# Altium PCB PCB_DA1.PcbDoc
Units mm, origin at the board's own origin, x right, y up, seen from the top; angles counter-clockwise.
Board outline 80 x 45 mm, 2 copper layers (Top Layer, Bottom Layer); 16 components, 12 nets, 60 pads, 0 vias.
Unrouted connection lines stored in the file: 3.
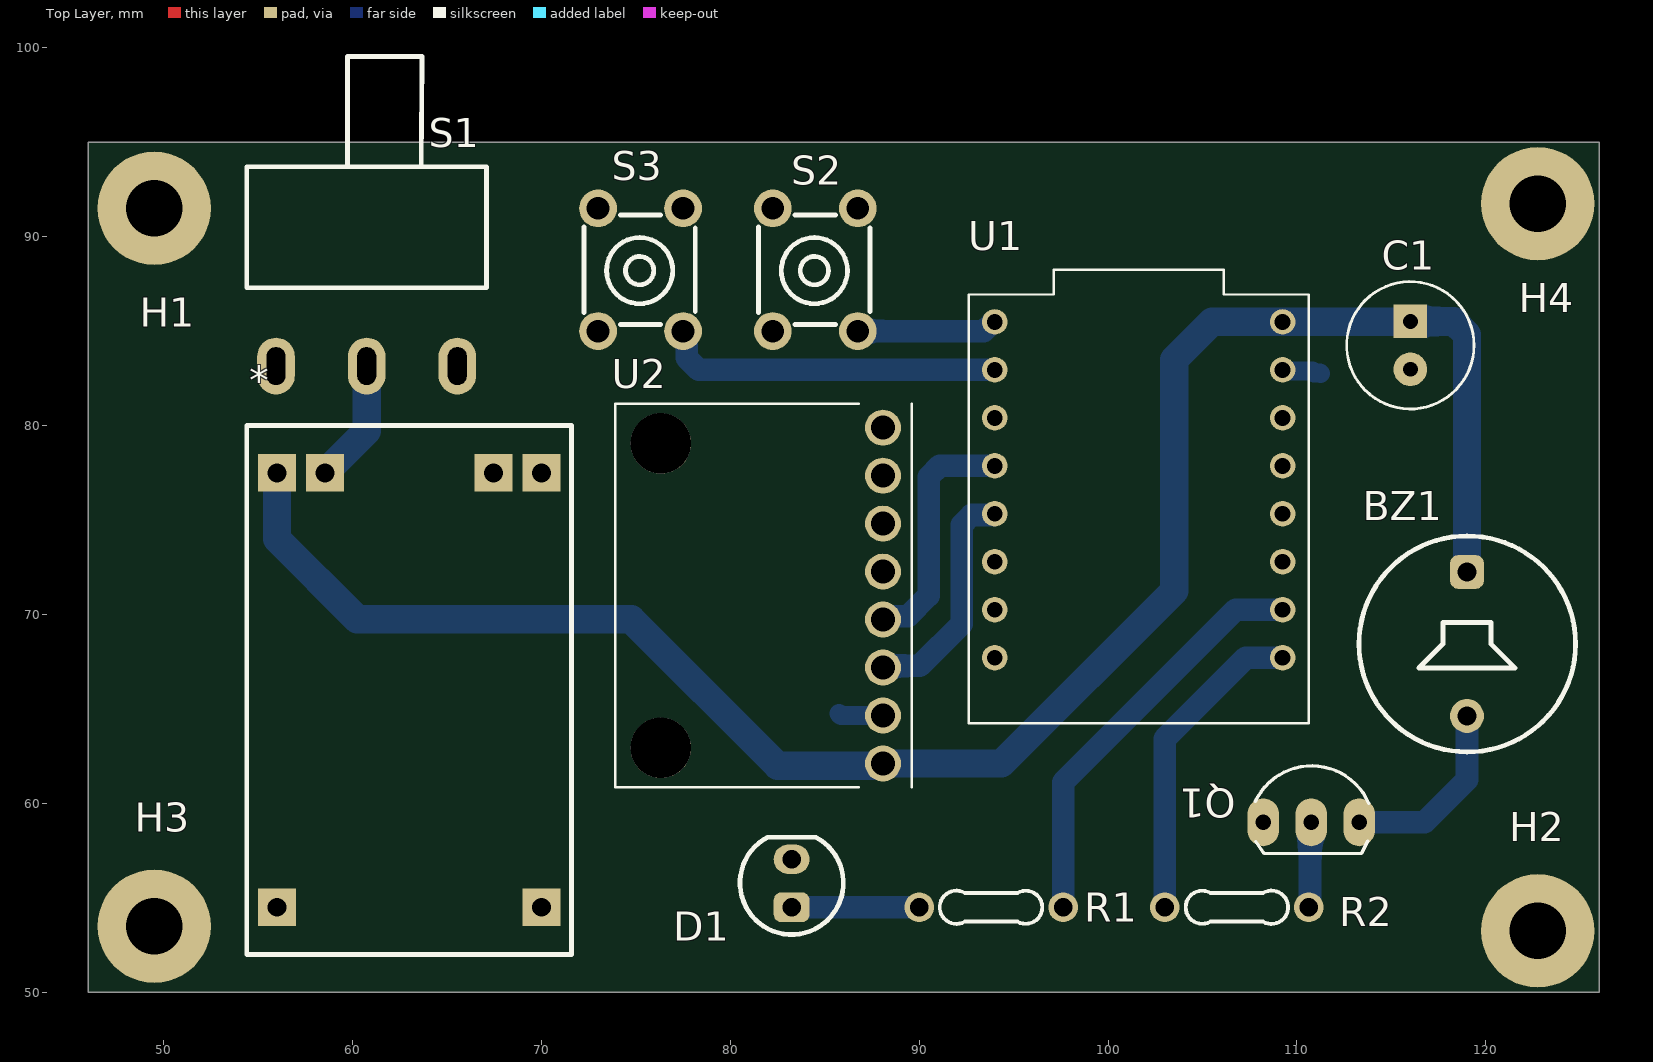
[diagram p0: Top Layer view]
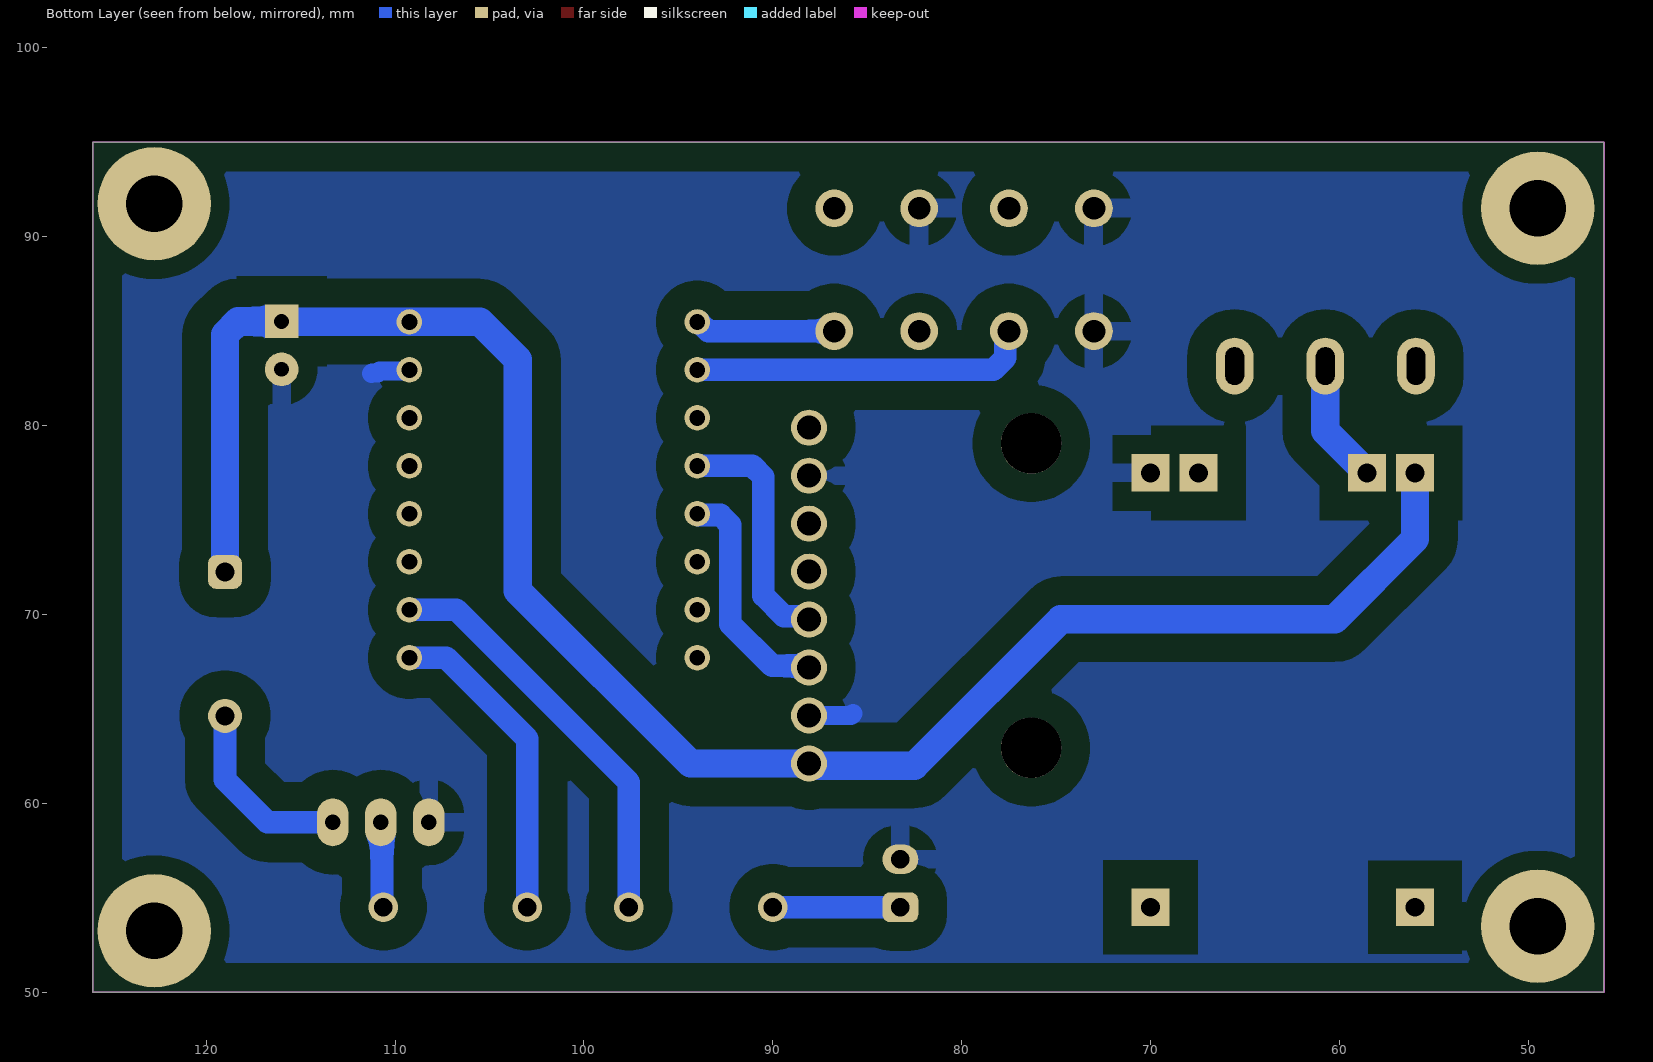
[diagram p1: Bottom Layer view, seen from below]
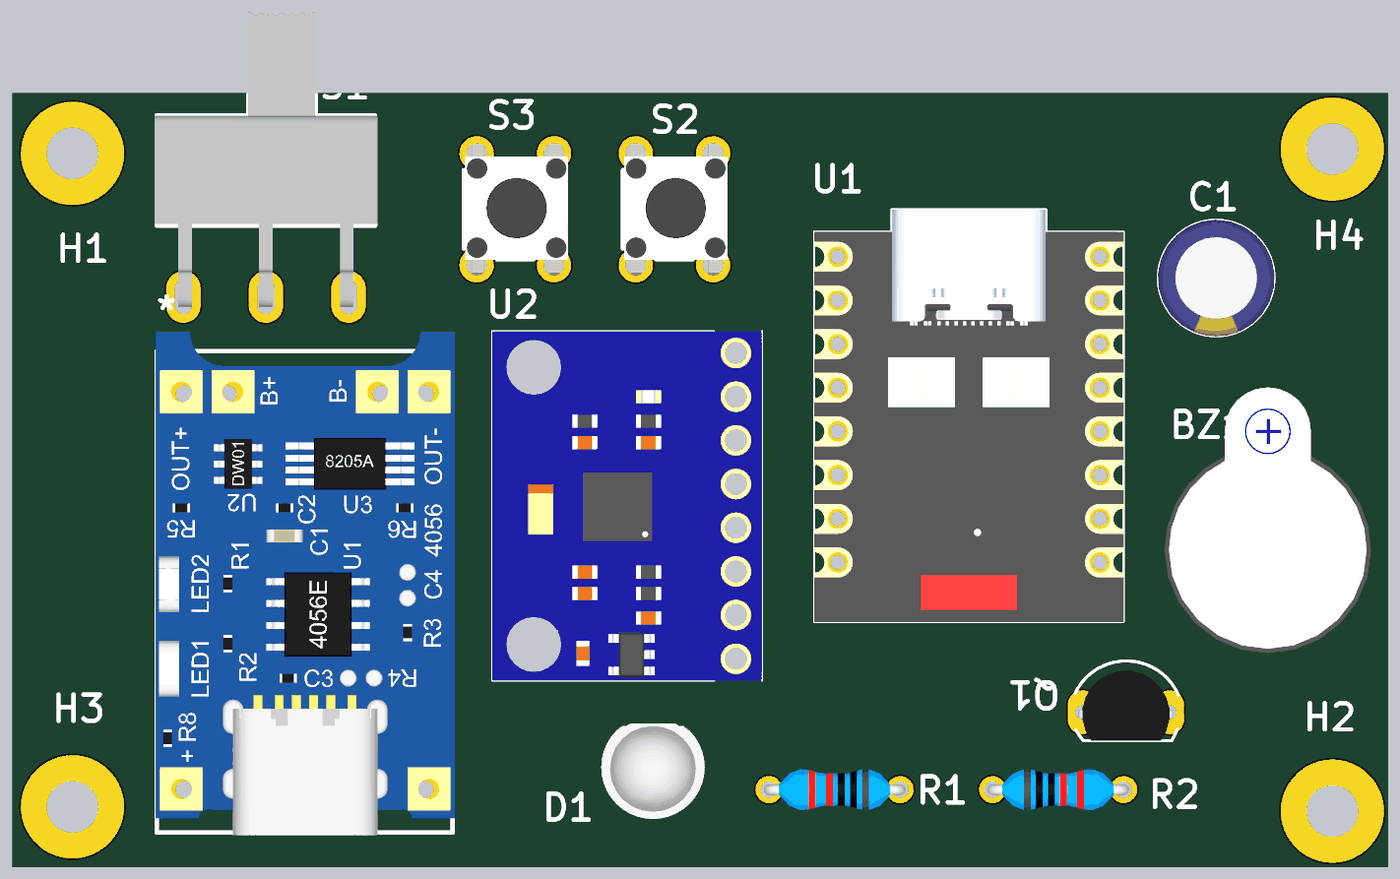
[diagram p2: 3D render of the assembled board from above, using the file's embedded part models]

## Layer stack, top to bottom
Top Solder: solder mask 0.0102, Solder Resist, Dk 3.5
Top Layer: signal copper 0.0356
Dielectric 1: dielectric 0.32, FR-4, Dk 4.8
Bottom Layer: signal copper 0.0356
Bottom Solder: solder mask 0.0102, Solder Resist, Dk 3.5

## Board outline
46,69.797 46,95 126,95 126,50 46,50

## Design rules (kind name [scope] priority, off if disabled: settings)
Clearance Clearance_3 [InComponent('H*')] p1: gap=0 ignorepadtopadclearanceinfootprint=FALSE
Clearance Clearance_2 [InNet('ACL*') OR InNet('ACN*')] p2: gap=0.35 ignorepadtopadclearanceinfootprint=FALSE except(0: Arc-Hole Track-Hole SMDPad-Hole THPad-Hole Via-Hole Fill-Hole Poly-Hole Region-Hole Text-Hole)
Clearance Clearance_1 [InPolygon] p3: gap=1.5 ignorepadtopadclearanceinfootprint=FALSE
Clearance [All] p4: gap=0.3 ignorepadtopadclearanceinfootprint=FALSE except(0: Arc-Hole Track-Hole SMDPad-Hole THPad-Hole Via-Hole Fill-Hole Poly-Hole Region-Hole Text-Hole)
ComponentClearance ComponentClearance_1 [InComponent('M802') OR  InComponent('P104') OR InComponent('Y202') OR InComponent('C101') OR InComponent('P101') OR InComponent('L101') OR  InComponent('S309') OR InComponent('S310') OR InComponent('H*')] p1: gap=0 collisioncheckmode=3 verticalgap=0 showdistances=FALSE
ComponentClearance [All] p2: gap=0.254 collisioncheckmode=3 verticalgap=0.254 showdistances=FALSE
Height [All] p1: minheight=0 maxheight=30 prefheight=12.7
PolygonConnect PolygonConnect_1 [IsVia] p1: connectstyle=Direct reliefconductorwidth=0.254 reliefentries=4 polygonreliefangle="90 Angle" airgapwidth=0.254
PolygonConnect PolygonConnect_2 [InNet('GND')] p2: connectstyle=Relief reliefconductorwidth=1 reliefentries=4 polygonreliefangle="90 Angle" airgapwidth=1
PolygonConnect [All] p3: connectstyle=Relief reliefconductorwidth=0.381 reliefentries=4 polygonreliefangle="90 Angle" airgapwidth=0.635
RoutingVias [All] p1: holewidth=0.4 width=0.8 viastyle="Through Hole" minholewidth=0.3 minwidth=0.6 maxholewidth=2 maxwidth=5
SolderMaskExpansion [All] p1: expansion=0.102 istentingtop=FALSE
SupplyNets "Schematic Supply Nets_1" [InNet('3V7')] p1: voltage=0.000
SupplyNets "Schematic Supply Nets" [InNet('GND')] p2: voltage=0.000
Width [All] p1: maxlimit=50 minlimit=0.2 preferedwidth=0.3
28 further rules are at their usual default settings.

## Classes and differential pairs
component class Sch_DA1: * BZ1 C1 D1 H1 H2 H3 H4 Q1 R1 R2 S1 S2 S3 U2

## Components (designator, comment, footprint, x,y, rotation, side; value= is the part's Value field where it differs from the comment)
* "Module_TP4056" Module_TP4056 71.6,52 r90 top
BZ1 "Buzzer" BUZZER 119,72.25 r270 top
C1 "100uF" CYL/D.250/LS.100 116,84.25 r270 top
D1 "Led" "LED 5MM - RED" 83.25,55.77 r90 top
H1 "Screw Hole" SCREW/3.0/6.0 49.5,91.5 r0 top
H2 "Screw Hole" SCREW/3.0/6.0 122.75,53.25 r0 top
H3 "Screw Hole" SCREW/3.0/6.0 49.5,53.5 r0 top
H4 "Screw Hole" SCREW/3.0/6.0 122.75,91.75 r0 top
Q1 "2N222" TO92-123 110.75,59 r0 top value=C1815
R1 "330" "R 1/4W/300" 97.62,54.5 r180 top
R2 "1k" "R 1/4W/300" 103,54.5 r0 top
S1 "SS12D06" SS12D06 60.75,90.5 r180 top
S2 "BUTTON" PUSH_BUTTON_6X6 84.5,88.25 r90 top
S3 "BUTTON" PUSH_BUTTON_6X6 75.25,88.25 r90 top
U1 "ESP32-C3_SUPERMINI_TH" MODULE_ESP32-C3_SUPERMINI_TH 101.62,75.59 r0 top
U2 "MPU-6050" MODULE_GY-521 81.75,71 r180 top

## Footprints (in the part's own frame and the unit in brackets; to place one, negate y for a bottom-side part, rotate by r counter-clockwise, add the part's x,y. Pads: shape width x height; smd on the part's side, far side on the other; paste and mask are expansions set on the pad)
BUZZER [mm] "DC Buzzer 5V/12V"
  rrect50% 1.8x1.8 hole 1: 1(0,0)
  round 1.8 hole 1: 2(7.62,0)
  silkscreen extent -1.91,-5.71 9.53,5.75, body extent -5.64,-6 9.81,6, height 9.65
CYL/D.250/LS.100 [mil]
  rect 70x70 hole 31: 1(-50,0)
  round 70 hole 31: 2(50,0)
  silkscreen extent -133,-133 133,133, body extent -134,-133 133,133, height 492
"LED 5MM - RED" [mil]
  rrect50% 62x75 hole 39: 1(-50,0)
  oval 62x75 hole 39: 2(50,0)
  silkscreen extent -107,-108 96,108, body extent -117,-118 96,119, height 340
MODULE_ESP32-C3_SUPERMINI_TH [mm]
  round 1.348 hole 0.84: 0(7.62,-7.88) 1(7.62,-5.34) 2(7.62,-2.8) 3(7.62,-0.26) 3.3(7.62,4.82) 4(7.62,2.28) 5(-7.62,9.9) 5V(7.62,9.9) 6(-7.62,7.36) 7(-7.62,4.82) 8(-7.62,2.28) 9(-7.62,-0.26) 10(-7.62,-2.8) 20(-7.62,-5.34) 21(-7.62,-7.88) G(7.62,7.36)
  silkscreen extent -9,-11.35 9,12.65, body extent -9,-11.35 9,12.65, height 4.16
MODULE_GY-521 [mm]
  round 1.905 hole 1.27 mask+0.102: AD0(-6.33,-6.35) GND(-6.33,6.35) INT(-6.33,-8.89) SCL(-6.33,3.81) SDA(-6.33,1.27) VCC(-6.33,8.89) XCL(-6.33,-3.81) XDA(-6.33,-1.27)
  round 3.2 hole 3.2 unplated mask+0: ""(5.43,8.06) ""(5.43,-8.06)
  silkscreen extent -7.85,-10.15 7.85,10.15, body extent -7.85,-10.15 7.85,10.15, height 3
Module_TP4056 [mm]
  rect 2x2 hole 1: 1(2.5,15.6) 2(2.5,1.6) 3(25.5,15.6) 4(25.5,13.06) 5(25.5,4.14) 6(25.5,1.6)
  silkscreen extent 0,0 28,17.2, body extent -0.16,-0.13 29.14,17.27, height 3.8
PUSH_BUTTON_6X6 [mm]
  round 2 hole 1.2: 1(-3.25,-2.25) 1(3.25,-2.25) 2(-3.25,2.25) 2(3.25,2.25)
  silkscreen extent -2.9,-2.9 2.9,3, body extent -3.94,-3.07 4.07,2.93, height 6.8
"R 1/4W/300" [mil] "Through hole resitor, axial 300mils, 1/4W"
  round 62 hole 38: 1(0,0) 2(300,0)
  silkscreen extent 44,-35 257,35, body extent -12,-47 312,47, height 97
SCREW/3.0/6.0 [mm]
  round 6 hole 3: 1(0,0)
  Top Layer pour cut-out: -4,0 -3.696,1.531 -2.828,2.828 -1.531,3.695 0,4 0,4 1.531,3.695 2.828,2.828 3.695,1.531 4,0 4,0 3.696,-1.531 2.828,-2.828 1.531,-3.696 0,-4 0,-4 -1.531,-3.696 -2.828,-2.828 -3.696,-1.531 -4,0
  Bottom Layer pour cut-out: -4,0 -3.696,1.531 -2.828,2.828 -1.531,3.695 0,4 0,4 1.531,3.695 2.828,2.828 3.695,1.531 4,0 4,0 3.696,-1.531 2.828,-2.828 1.531,-3.696 0,-4 0,-4 -1.531,-3.696 -2.828,-2.828 -3.696,-1.531 -4,0
SS12D06 [mm]
  oval 2x3 hole 1 slot 2 at 90 deg: 1(-4.8,7.35) 3(4.8,7.35)
  oval 2x3 hole 1 slot 2 at 90 deg unplated: 2(0,7.35)
  silkscreen extent -6.35,-9.03 6.35,3.2, body extent -6.47,-9.19 6.48,7.91, height 6.8
TO92-123 [mil] "TO-92"
  oval 66x100 hole 32: 1(-100,0) 2(0,0) 3(100,0)
  silkscreen extent -117,-65 120,118, body extent -109,-66 109,95, height 245

## Part data
C1: library part Capacitor, "Capacitor pol"
D1: "Typical LED"
Q1: "NPN 600mW, ECB"
R1 R2: library part Resistor, "Resistor"
S1: "Lying Slide Switch 3 Pins."
S2 S3: library part PUSH_BUTTON_6X6, "Push Button Tactile Switch PTH 4 Pins 6x6mm.", JLCPCB PN=C255811
U1: "Super tiny ESP32-C3 board", PACKAGE=Package, Check_prices=https://www.snapeda.com/parts/ESP32-C3%20SuperMini_TH/Espressif+Systems/view-part/?ref=eda, MF="Espressif Systems", MP="ESP32-C3 SuperMini_TH", SnapEDA_Link=https://www.snapeda.com/parts/ESP32-C3%20SuperMini_TH/Espressif+Systems/view-part/?ref=snap
U2: library part GY-521, "Triple Axis Accelerometer Gyro Breakout", PACKAGE=Package, Check_prices=https://www.snapeda.com/parts/GY-521/GODREAM+FORDREAM+CO.%252C+LIMITED/view-part/?ref=eda, MF="GODREAM FORDREAM CO., LIMITED", MP=GY-521, SnapEDA_Link=https://www.snapeda.com/parts/GY-521/GODREAM+FORDREAM+CO.%252C+LIMITED/view-part/?ref=snap
H1 H2 H3 H4: TYPE=NO-BOM, UNIT PRICE=0

## Nets (pads, with @x,y where several pads share a name; then routed paths per layer and width w, separated by ;. In a path a pad name is that pad's centre, name@x,y a point inside that pad or via, vN(x,y) a via of type N, cw(c..) or ccw(c..) an arc to the next point about the centre after c; other vN are vias at no path point)
3V7: *.3 BZ1.1 C1.1 U1.5V U2.VCC | length 101.3
  Bottom Layer w1.5: *.3 56,74 60.25,69.75 74.75,69.75 82.5,62 87.97,62 U2.VCC 94.36,62.11 103.5,71.25 103.5,83.5 105.5,85.5 109.23,85.5 U1.5V 109.255,85.505 115.985,85.505 C1.1 118.297,85.52 119,84.817 BZ1.1
ALERT: S3.1 U1.6 | length 18.1
  Bottom Layer w1.2: S3.1@77.5,85 77.691,84.809 77.691,83.586 78.327,82.95 U1.6
BUZ: R2.1 U1.0 | length 16.9
  Bottom Layer w1.2: R2.1 103,63.42 107.29,67.71 U1.0
CANCEL: S2.1 U1.5 | length 7.5
  Bottom Layer w1.2: S2.1@86.75,85 93.416,85 93.906,85.49 U1.5
GND: *.6 C1.2 D1.2 Q1.1 S2.2 S3.2 U1.G U2.AD0 U2.GND | length 4.5
  Bottom Layer w1: 85.75,64.75 85.85,64.65 U2.GND ; U1.G 109.307,82.883 110.816,82.883 110.914,82.785 111.215,82.785 111.25,82.75
LED: R1.1 U1.1 | length 22
  Bottom Layer w1.2: R1.1 97.62,61.12 106.75,70.25 U1.1
Net*_4: *.4 S1.2 | length 6.6
  Bottom Layer w1.5: *.4 60.75,79.71 S1.2
NetBZ1_2: BZ1.2 Q1.3 | length 10
  Bottom Layer w1.2: Q1.3 116.75,59 119,61.25 BZ1.2
NetD1_1: D1.1 R1.2 | length 6.7
  Bottom Layer w1.2: D1.1 R1.2
NetQ1_2: Q1.2 R2.2 | length 4.6
  Bottom Layer w1.2: R2.2 110.685,54.565 110.685,58.935 Q1.2
SCL: U1.9 U2.SCL | length 12.4
  Bottom Layer w1.2: U2.SCL 88.172,67.282 90.032,67.282 92.25,69.5 92.25,74.744 92.769,75.263 93.933,75.263 U1.9
SDA: U1.8 U2.SDA | length 13
  Bottom Layer w1.2: U2.SDA 88.253,69.903 89.403,69.903 90.5,71 90.5,77.284 91.086,77.87 U1.8
pads on no net: *.1 *.2 *.5 H1.1 H2.1 H3.1 H4.1 S1.1 S1.3 U1.2 U1.3 U1.3.3 U1.4 U1.7 U1.10 U1.20 U1.21 U2. U2.INT U2.XCL U2.XDA

## Polygon pours and split planes (outlines as drawn)
GND on Bottom Layer "GND" (solid, remove dead copper, pour order 0): 46,95 46,50 126,50 126,95

## Keep-outs
Bottom Layer:
  lines w0.1: 46,50 126,50 126,95 46,95 46,85 46,69.797 46,60.891 46,55.437 46,50